# EAGLE board afron_shield (EAGLE 6.1)
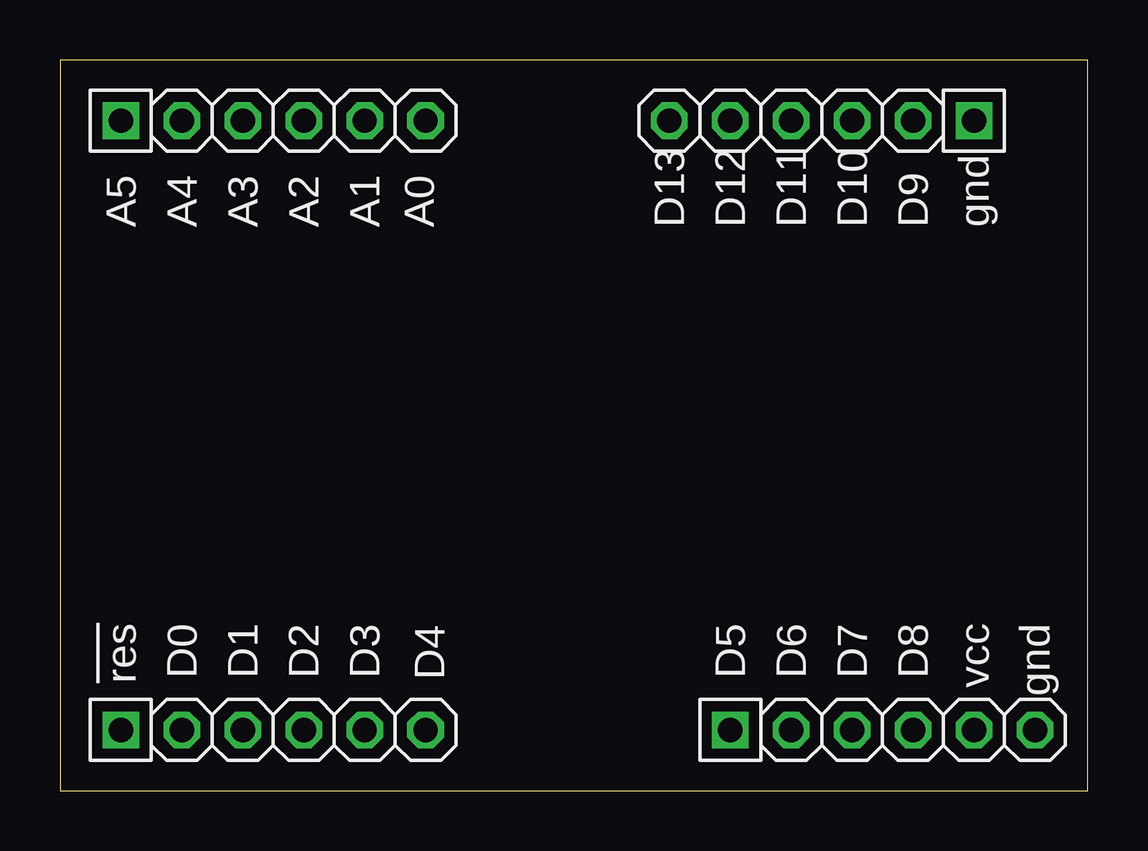
[diagram p0: board, top side]
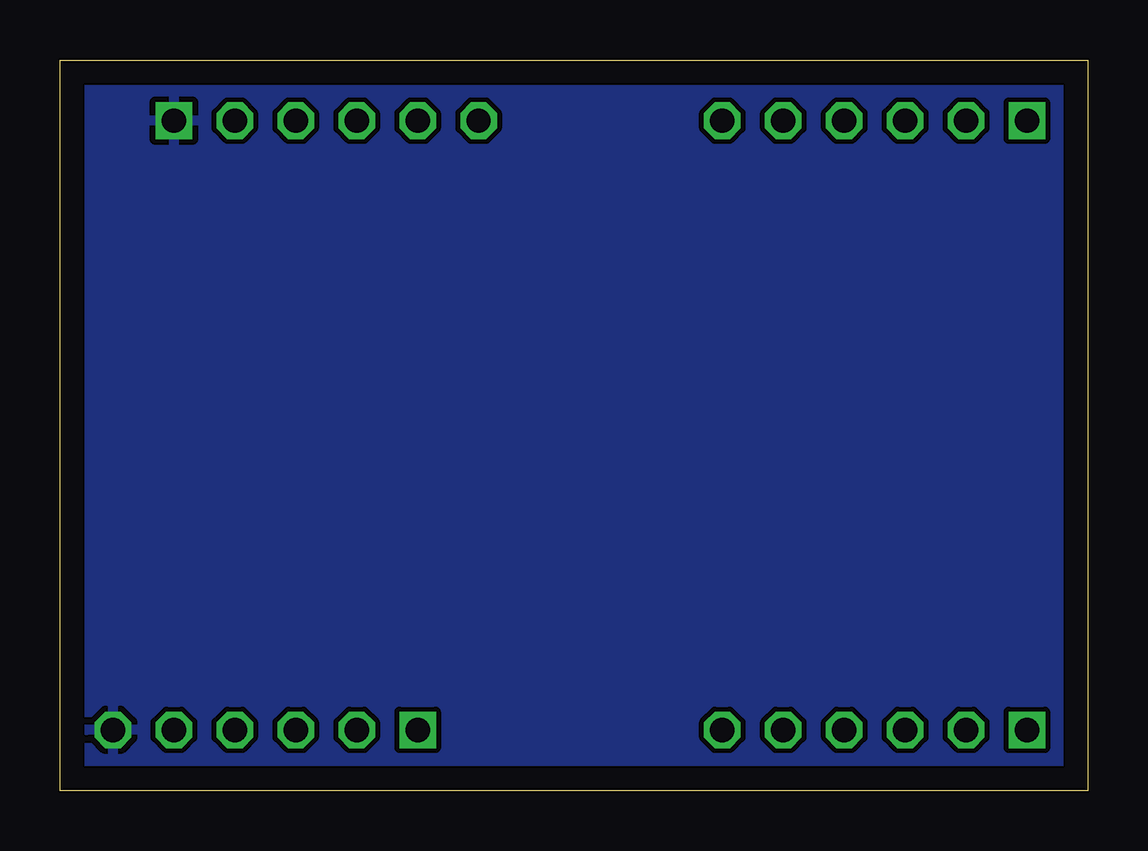
[diagram p1: board, bottom side, seen from below]

Size 42.85 x 30.47 mm. Coordinates in mm from the lower left corner, seen from the top.
Outline: 0,0 42.85,0 42.85,30.47 0,30.47 0,0
Copper layers (1*16): Top 0.035mm / dielectric 1.5mm / Bottom 0.035mm
Design rules: minimum track width 10mil, minimum drill 24mil, track to track 8mil, track to pad 8mil, pad to pad 8mil, via to via 8mil, smd to smd 8mil, copper to edge 40mil, drill to drill 8mil, minimum pad ring 10mil, minimum via ring 8mil, stop-mask expansion 4mil, vias tented up to drill 0mil, thermal gap 10mil

## Footprints (pad centres in the part's own frame; a part is rotated, then mirrored left to right if it is on the bottom)
1X06-S = drill 1.016 square: 1 -6.35,0 | drill 1.016 octagon: 2 -3.81,0; 3 -1.27,0; 4 1.27,0; 5 3.81,0; 6 6.35,0

## Placement (x,y rotation side)
J1  D  [1X06-S]  8.89,2.54 0 top
J2  C  [1X06-S]  34.29,2.54 0 top
J3  B  [1X06-S]  31.75,27.94 180 top
J4  A  [1X06-S]  8.89,27.94 0 top

## Library data of the parts
J1-J4 = pinhead-2

## Nets
!RESET: J1.1
A0: J4.6
A1: J4.5
A2: J4.4
A3: J4.3
A4: J4.2
A5: J4.1
D0: J1.2
D1: J1.3
D2: J1.4
D3: J1.5
D4: J1.6
D5: J2.1
D6: J2.2
D7: J2.3
D8: J2.4
D9: J3.2
D10: J3.3
D11: J3.4
D12: J3.5
D13: J3.6
GND: J2.6 J3.1
VCC: J2.5

## Tracks (layer width: path | path; a pad name or v marks a point on that pad's centre or on a via)
GND
  pour Bottom: 0,30.48 43.18,30.48 43.18,0 0,0

## Text on the board
tNames: A5 | A4 | A3 | A2 | A1 | A0 | D13 | D12 | D11 | D10 | D9 | gnd | !res | D0 | D1 | D2 | D3 | D4 | D5 | D6 | D7 | D8 | vcc | gnd